# Altium PCB kardio (8).pcbdoc
Units mm, origin at the board's own origin, x right, y up, seen from the top; angles counter-clockwise.
Board outline 75 x 75 mm, 2 copper layers (Top Layer, Bottom Layer); 36 components, 33 nets, 151 pads, 20 vias.
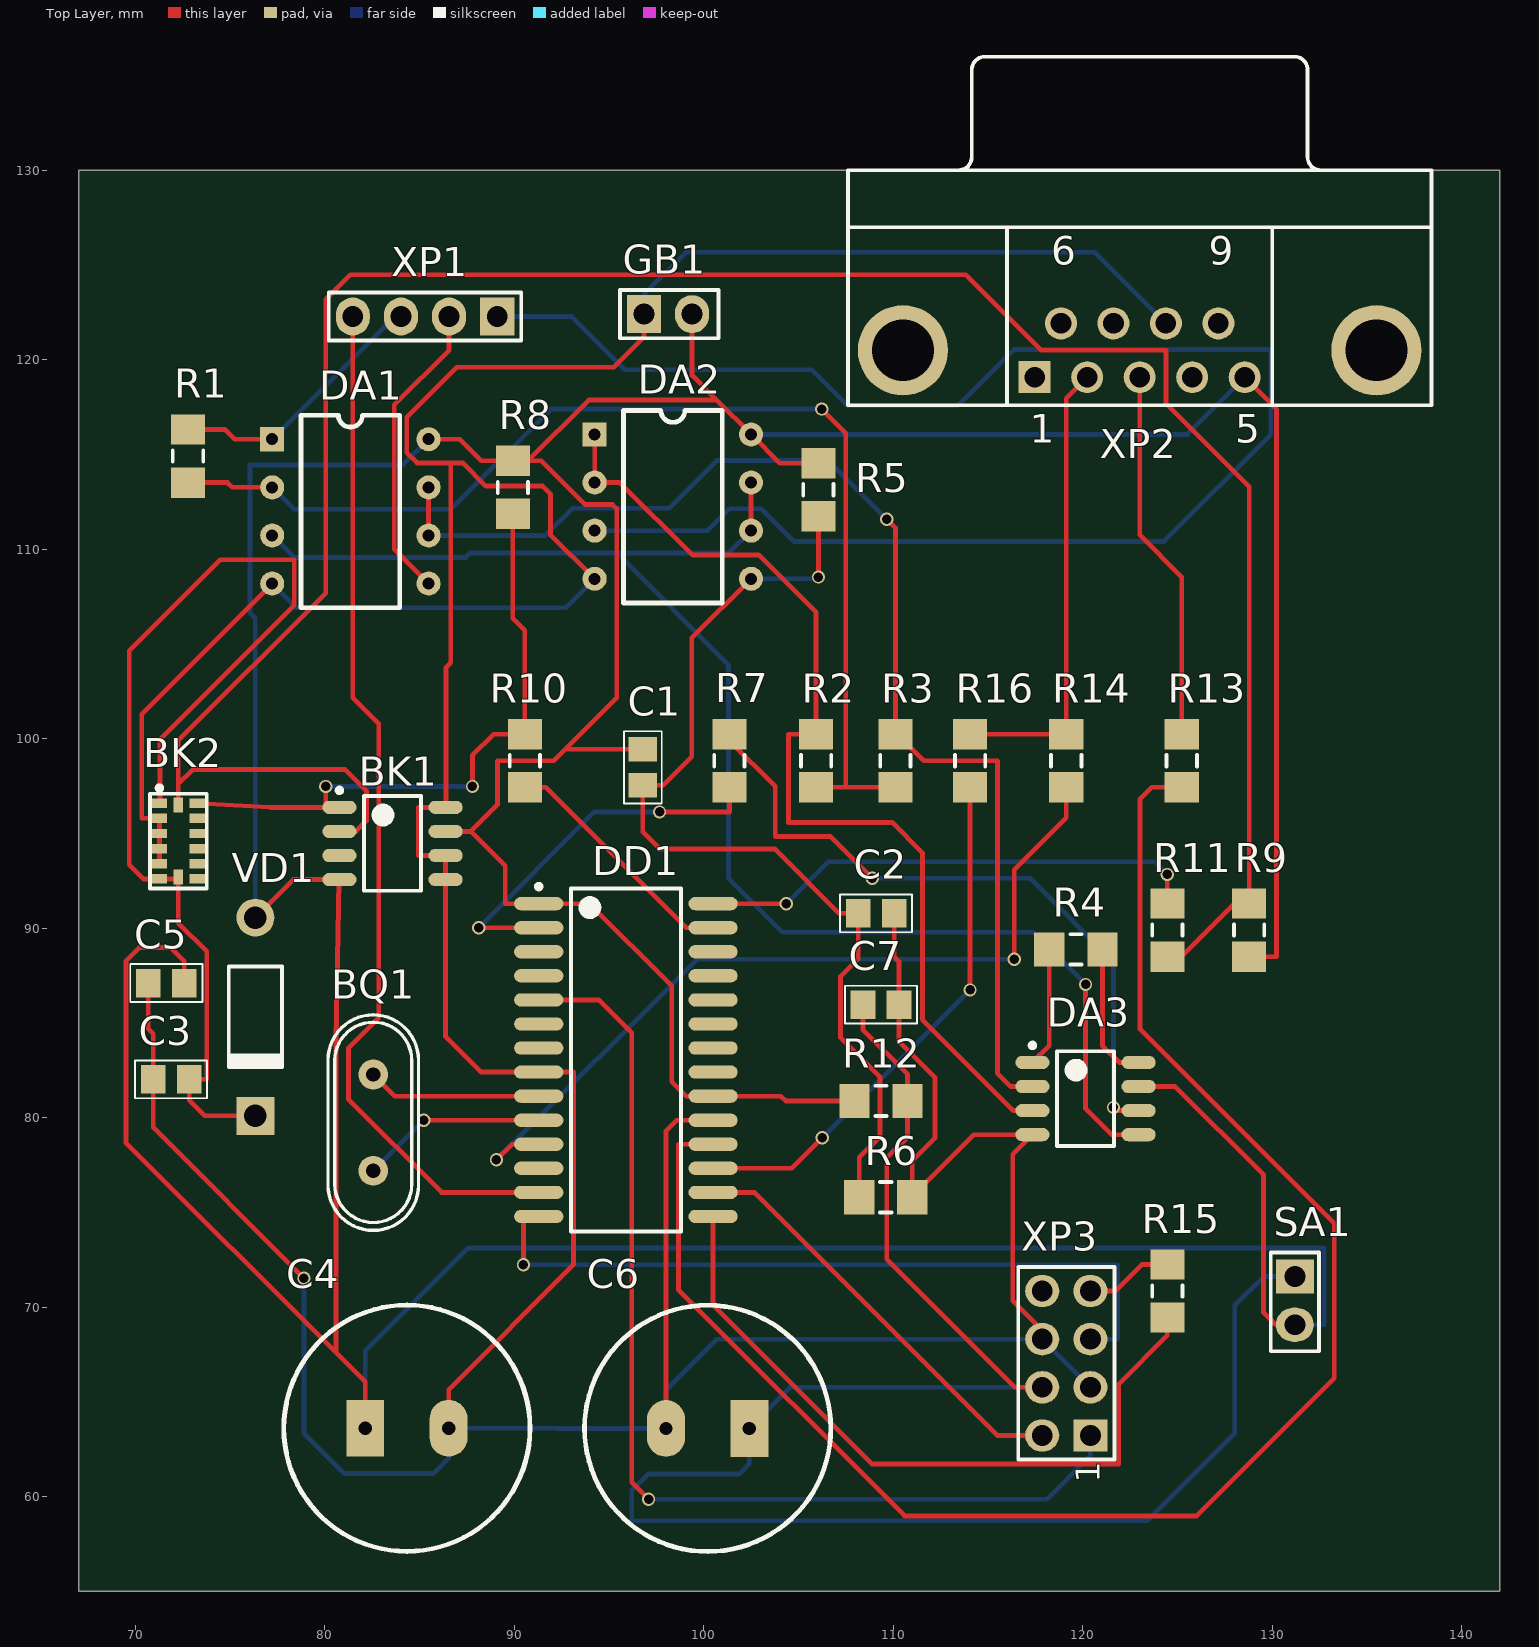
[diagram p0: Top Layer view]
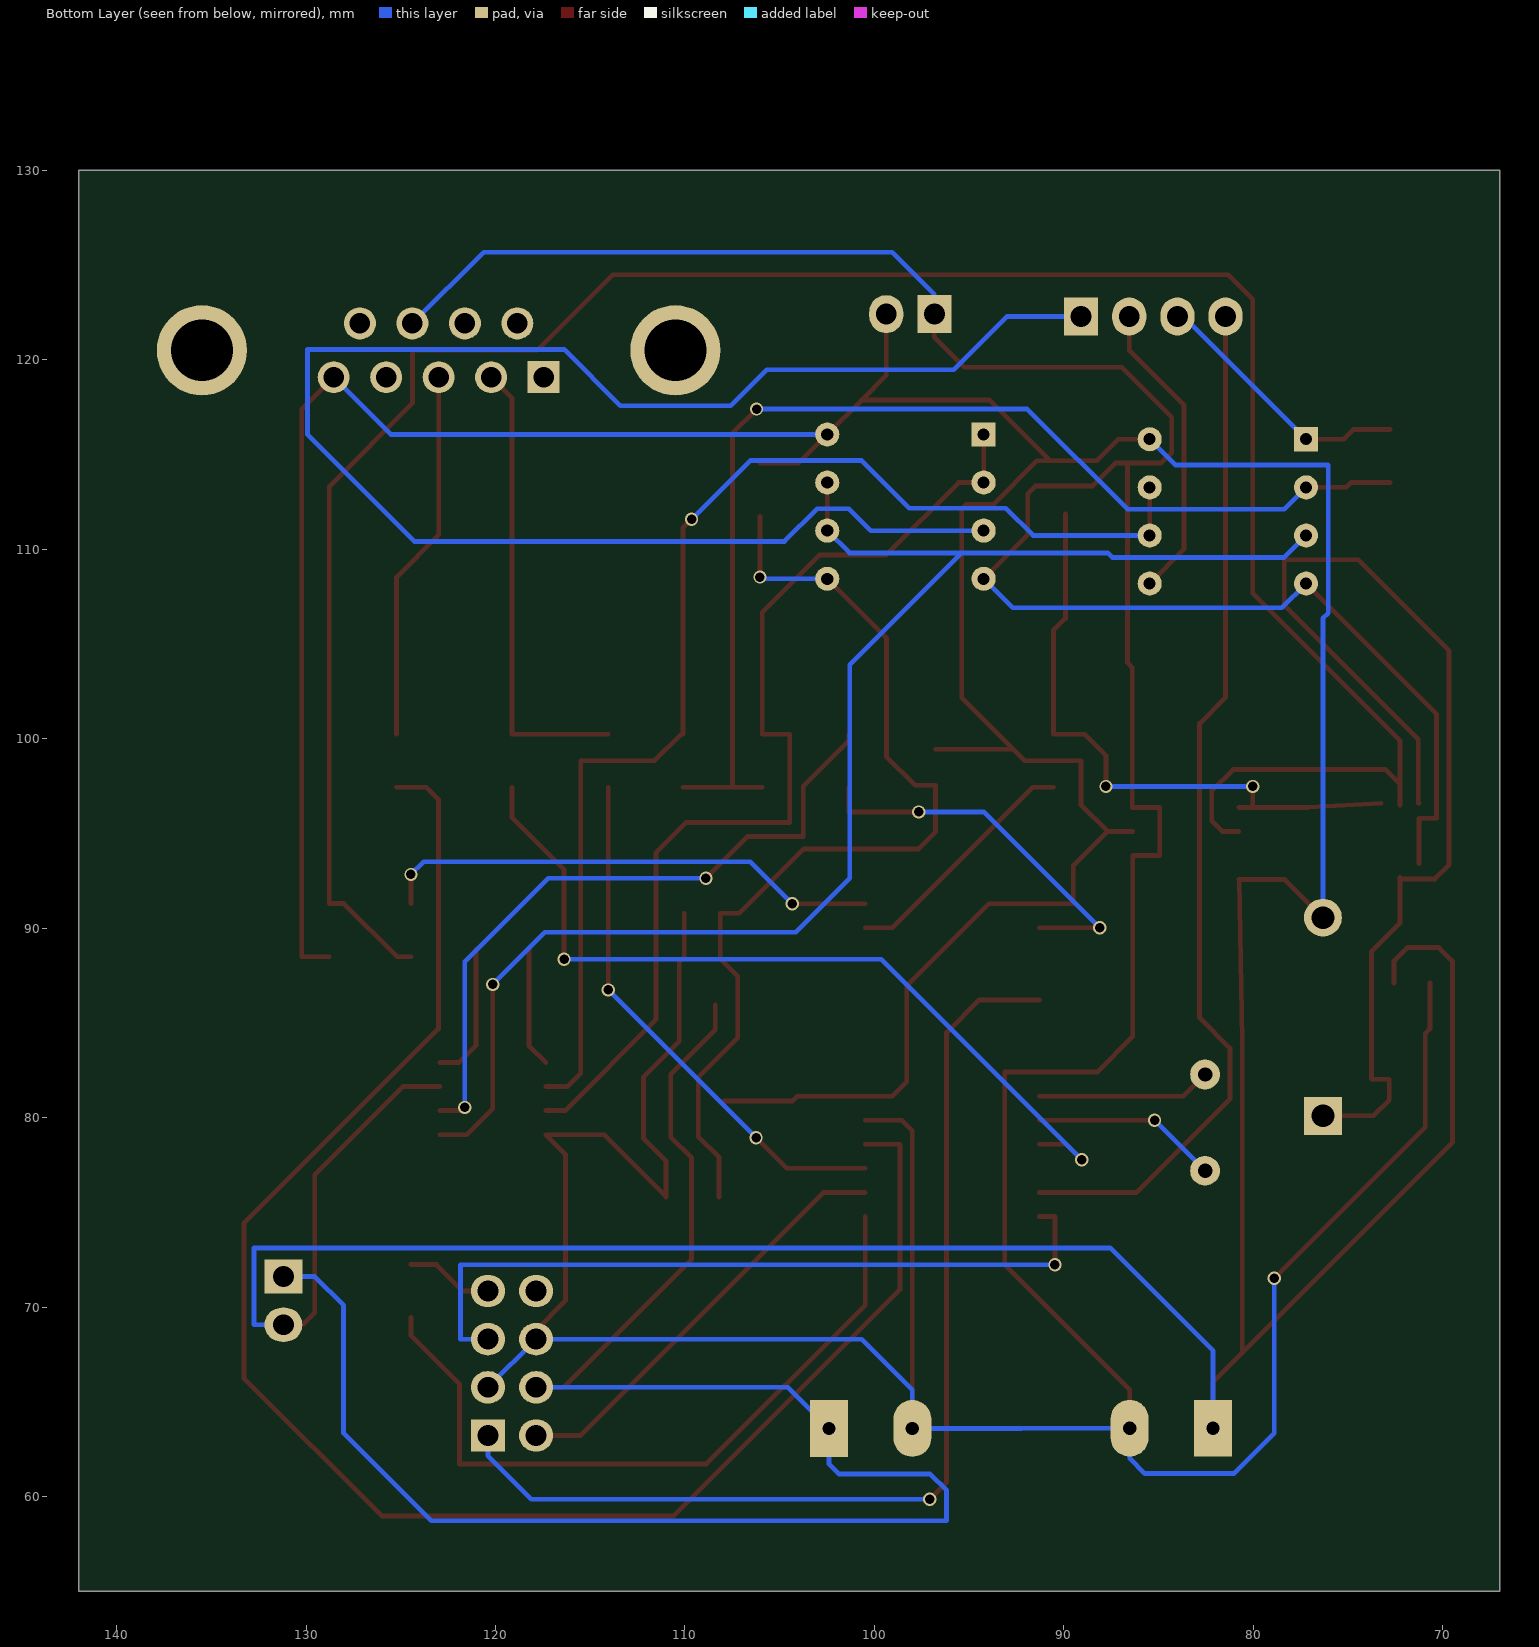
[diagram p1: Bottom Layer view, seen from below]

## Layer stack, top to bottom
Top Layer: signal copper 0.0356
Dielectric: dielectric 0.32, FR-4, Dk 4.8
Bottom Layer: signal copper 0.0356

## Board outline
67,55 142,55 142,130 67,130

## Design rules (kind name [scope] priority, off if disabled: settings)
Clearance [All] p1: gap=0.4
PolygonConnect [All] p1: connectstyle=Relief reliefconductorwidth=0.254 reliefentries=4 polygonreliefangle="90 Angle" airgapwidth=0.254
RoutingCorners [All] p1: cornerstyle=Round minsetback=0.2 maxsetback=2.54
RoutingVias [All] p1: holewidth=0.5 width=0.7 viastyle="Through Hole" minholewidth=0.5 minwidth=0.7 maxholewidth=0.711 maxwidth=1.27
SolderMaskExpansion [All] p1: expansion=0.102
Width [All] p1: maxlimit=0.25 minlimit=0.25 preferedwidth=0.25
27 further rules are at their usual default settings.

## Components (designator, comment, footprint, x,y, rotation, side; value= is the part's Value field where it differs from the comment)
BK1 "DS1621" SOIC-8CM 83.566,94.472 r0 top
BK2 "MMA7455LT" SOJ80P300X0-12M 72.263,94.599 r0 top
BQ1 "10МГц" HC49S 82.55,79.74 r90 top
C1 "0.22мк" C0805 96.774,98.489 r90 top
C2 "0.22мк" C0805 109.093,90.789 r180 top
C3 "0.1мк" C0805 71.882,82.026 r180 top
C4 "1000мк" "LZ 12x26 1000 мкФ x 25 В" 84.328,63.611 r0 top
C5 "0.1мк" C0805 71.628,87.106 r180 top
C6 "1000мк" "LZ 12x26 1000 мкФ x 25 В" 100.2,63.6 r180 top
C7 "0.1мк" C0805 109.347,85.963 r0 top
DA1 "КР1446УД1" PDIP8 77.216,115.808 r0 top
DA2 "КР1446УД1" PDIP8 94.234,116.062 r0 top
DA3 "AD623" SOIC-8CM 120.142,81.01 r0 top
DD1 "PIC16F873A" SOIC-SO28_M 95.885,83.042 r0 top
GB1 "3.6B" Button 100.521,123.428 r0 top
R1 "720К" 1206 72.771,114.919 r270 top
R2 "20К" 1206 105.918,98.841 r90 top
R3 "20К" 1206 110.109,98.841 r90 top
R4 "20К" 1206 119.634,88.884 r180 top
R5 "150К" 1206 106.045,113.141 r90 top
R6 "150К" 1206 109.601,75.803 r180 top
R7 "300" 1206 101.346,98.841 r270 top
R8 "4К7" 1206 89.916,113.268 r270 top
R9 "4К7" 1206 128.778,89.9 r90 top
R10 "300" 1206 90.551,98.841 r270 top
R11 "300" 1206 124.46,89.9 r90 top
R12 "10" 1206 109.347,80.883 r0 top
R13 "300" 1206 125.222,98.841 r90 top
R14 "300" 1206 119.126,98.841 r90 top
R15 "300" 1206 124.46,70.85 r90 top
R16 "300" 1206 114.046,98.841 r90 top
SA1 "Button" Button 132.207,67.929 r270 top
VD1 "КД522" DO-41 76.327,85.328 r270 top
XP1 "INPUT" "HDR1X4 - WA" 89.091,122.285 r180 top
XP2 "COM-port" COM-port 123,130 r0 top
XP3 "SD-card" "HDR2X4 - wide area" 120.396,63.23 r90 top

## Footprints (in the part's own frame and the unit in brackets; to place one, negate y for a bottom-side part, rotate by r counter-clockwise, add the part's x,y. Pads: shape width x height; smd on the part's side, far side on the other; paste and mask are expansions set on the pad)
1206 [mm] "Chip Resistor; Body 3.1 x 1.6 mm (LxW typ)"
  rect 1.6x1.8 smd: 1(-1.4,0) 2(1.4,0)
  silkscreen extent -0.3,-0.8 0.3,0.8
Button [mm]
  rect 1.8x2 hole 1.1: 1(-3.683,-1.016)
  oval 1.8x2 hole 1.1: 2(-1.143,-1.016)
  silkscreen extent -4.95,-2.29 0.25,0.25
C0805 [mm] "Chip Capacitor; Body 2.0 x 1.2 mm (LxW typ)"
  rect 1.3x1.5 smd: 1(-0.95,0) 2(0.95,0)
  silkscreen extent -1.9,-1 1.91,1
COM-port [mm] "Connector; D Subminiature AMPLIMITE 2000; 9 Position; Right Angle"
  rect 1.69x1.69 hole 1.09: 1(-5.54,-10.92)
  round 1.69 hole 1.09: 2(-2.77,-10.92) 3(0,-10.92) 4(2.77,-10.92) 5(5.54,-10.92) 6(-4.155,-8.08) 7(-1.385,-8.08) 8(1.385,-8.08) 9(4.155,-8.08)
  round 4.76 hole 3.26: 10(-12.495,-9.5) 11(12.495,-9.5)
  silkscreen extent -15.4,-12.4 15.4,6, body extent -15.4,-12.4 15.4,6, height 12.75
DO-41 [mm] "Diode, Axial; Body 5.2 x 2.7 mm (LxDia. max), Lead Dia. 0.86 mm (max)"
  round 2 hole 1.2: 1(-5.23,0)
  rect 2x2 hole 1.2: 2(5.23,0)
  silkscreen extent -2.65,-1.4 2.75,1.4
HC49S [mil]
  round 62 hole 30: 1(-100,0) 2(100,0)
  silkscreen extent -224,-94 224,94
"HDR1X4 - WA" [mm] "Разъем двухрядный, шаг 2,54 мм."
  rect 1.8x2 hole 1.1: 1(0,0)
  oval 1.8x2 hole 1.1: 2(2.54,0) 3(5.08,0) 4(7.62,0)
  silkscreen extent -1.27,-1.27 8.89,1.27
"HDR2X4 - wide area" [mm] "Connector; Header; 4x2 Position"
  rect 1.7x1.8 hole 1.1: 1(0,0)
  oval 1.7x1.8 hole 1.1: 2(0,2.54) 3(2.54,0) 4(2.54,2.54) 5(5.08,0) 6(5.08,2.54) 7(7.62,0) 8(7.62,2.54)
  silkscreen extent -1.27,-1.27 8.89,3.81
"LZ 12x26 1000 мкФ x 25 В" [mm] "D=12.0 d=0.7 S=4.4"
  rect 2x3 hole 0.7: 1(-2.2,0)
  oval 2x3 hole 0.7: 2(2.2,0)
  silkscreen extent -6.5,-6.5 6.5,6.5
PDIP8 [mm]
  rect 1.27x1.27 hole 0.635: 1(0,0)
  round 1.27 hole 0.635: 2(0,-2.54) 3(0,-5.08) 4(0,-7.62) 5(8.255,-7.62) 6(8.255,-5.08) 7(8.255,-2.54) 8(8.255,0)
  silkscreen extent 1.52,-8.89 6.73,1.27
SOIC-8CM [mm] "SOIC, 8-Leads, Body 4.9x3.9mm, Pitch 1.27mm, IPC Low Density"
  oval 1.8x0.7 smd: 1(-2.8,1.905) 2(-2.8,0.635) 3(-2.8,-0.635) 4(-2.8,-1.905) 5(2.8,-1.905) 6(2.8,-0.635) 7(2.8,0.635) 8(2.8,1.905)
  silkscreen extent -2.92,-2.5 1.5,2.93, body extent -2,-2.5 2,2.5, height 1.73
SOIC-SO28_M [mm] "SOIC, 28-Leads, Body 17.9x7.5mm, Pitch 1.27mm, IPC Low Density"
  oval 2.6x0.7 smd: 1(-4.6,8.255) 2(-4.6,6.985) 3(-4.6,5.715) 4(-4.6,4.445) 5(-4.6,3.175) 6(-4.6,1.905) 7(-4.6,0.635) 8(-4.6,-0.635) 9(-4.6,-1.905) 10(-4.6,-3.175) 11(-4.6,-4.445) 12(-4.6,-5.715) 13(-4.6,-6.985) 14(-4.6,-8.255) 15(4.6,-8.255) 16(4.6,-6.985) 17(4.6,-5.715) 18(4.6,-4.445) 19(4.6,-3.175) 20(4.6,-1.905) 21(4.6,-0.635) 22(4.6,0.635) 23(4.6,1.905) 24(4.6,3.175) 25(4.6,4.445) 26(4.6,5.715) 27(4.6,6.985) 28(4.6,8.255)
  silkscreen extent -4.72,-9.05 2.9,9.28, body extent -3.8,-9.06 3.8,9.06, height 2.65
SOJ80P300X0-12M [mm] "SOJ, 12-Leads, Body 5,00x3,00mm, Pitch 0,80mm, IPC Low Density"
  rect 0.8x0.5 smd: 1(-1,2) 2(-1,1.2) 3(-1,0.4) 4(-1,-0.4) 5(-1,-1.2) 6(-1,-2) 8(1,-2) 9(1,-1.2) 10(1,-0.4) 11(1,0.4) 12(1,1.2) 13(1,2)
  rect 0.5x0.8 smd: 7(0,-1.905) 14(0,1.905)
  silkscreen extent -1.5,-2.5 1.5,2.92, body extent -1.5,-2.5 1.5,2.5, height 0.01

## Part data
BK1: "Temperature sensor"
BK2: "Digital Output Accelerometer"
BQ1: library part "Cristal Oscilator"
C1 C2 C3 C5 C7: library part Capasitior
C4 C6: library part "Capasitor electrolit"
DA3: "Amplifier"
DD1: library part PIC16F873A-I/SO, "Enhanced FLASH Microcontroller, 4K (x14-Bit words) FLASH, 192 Bytes RAM, 28-Pin SOIC, Standard VDD Range, Industrial Temperature"
GB1: library part Batery
R1 R2 R3 R4 R5 R6 R7 R8 R9 R10 R11 R12 R13 R14 R15 R16: library part Resistor

## Via types
v1: diameter 0.7, hole 0.5, Top Layer to Bottom Layer, 20 vias

## Nets (pads, with @x,y where several pads share a name; then routed paths per layer and width w, separated by ;. In a path a pad name is that pad's centre, name@x,y a point inside that pad or via, vN(x,y) a via of type N, cw(c..) or ccw(c..) an arc to the next point about the centre after c; other vN are vias at no path point)
3.6В: BK1.4 BK1.7 C1.2 C4.1 C5.1 DA1.8 DA2.8 DA3.7 DD1.1 DD1.20 GB1.2 R5.2 R8.1 R9.1 R12.1 SA1.2 VD1.1 XP2.5 | length 331.5
  Top Layer w0.25: C5.1 72.578,88.265 71.867,88.976 70.206,88.976 69.494,88.265 69.494,78.689 80.588,67.596 ; VD1.1 78.336,92.567 BK1.4@80.747,92.567 ; BK1.4 BK1.4@80.747,92.567 ; C4.1 82.128,66.056 80.588,67.596 ; DA1.8 87.122,115.808 88.262,114.668 R8.1 R8.1@90.716,114.668 ; BK1.7 87.69,95.107 ; C1.2 92.683,99.439 ; GB1.2 99.378,119.173 100.679,117.872 ; R5.2 104.01,114.541 DA2.8 100.679,117.872 ; R12.1 104.318,80.883 104.064,81.137 DD1.20 99.06,81.137 98.298,81.899 98.298,86.954 93.955,91.297 DD1.1 89.51,91.297 89.51,93.288 87.69,95.107 ; DA3.7 124.882,81.645 129.54,76.987 129.54,69.707 130.175,69.072 SA1.2 ; XP2.5 130.226,117.394 130.226,88.5 R9.1 ; 80.588,67.596 80.588,84.083 BK1.4@80.747,92.567 ; 87.69,95.107 89.103,96.52 89.103,98.831 92.075,98.831 92.683,99.439 ; R8.1@90.716,114.668 91.428,114.668 93.734,112.362 95.173,112.362 95.394,112.141 95.394,102.15 92.683,99.439 ; R8.1@90.716,114.668 93.92,117.872 100.679,117.872
  Bottom Layer w0.25: VD1.1 76.327,106.35 76.048,106.629 76.048,114.452 84.115,114.452 DA1.8 ; C4.1 82.128,67.701 87.554,73.127 132.74,73.127 132.74,69.072 SA1.2 ; DA2.8 125.522,116.062 XP2.5
CS: DD1.5 XP3.1 | length 56
  Top Layer w0.25: DD1.5 94.463,86.217 96.19,84.49 96.19,60.757 v1(97.079,59.868)
  Bottom Layer w0.25: v1(97.079,59.868) 118.11,59.868 120.396,62.154 XP3.1
GND: BK1.5 BK1.6 BK1.8 BK2.2 BK2.3 BK2.4 BK2.5 C2.1 C3.2 C4.2 C5.2 C6.2 C7.2 DA1.4 DA2.4 DA3.4 DD1.8 DD1.19 GB1.1 R6.1 XP2.8 XP3.3 XP3.6 | length 291.5
  Top Layer w0.25: C5.2 70.678,84.684 70.932,84.43 C3.2 70.932,79.487 v1(78.892,71.526) ; BK2.5 BK2.4 BK2.3 BK2.2 70.342,95.799 70.333,95.809 70.333,101.305 DA1.4 ; C4.2 86.528,65.653 93.116,72.241 93.116,82.407 DD1.8 88.24,82.407 86.36,84.287 86.36,92.567 BK1.5 BK1.6 84.938,93.837 84.938,96.377 BK1.8 86.385,96.377 86.385,103.759 86.639,104.013 86.639,114.554 ; DA2.4 91.903,110.773 91.903,112.931 91.499,113.335 88.494,113.335 87.274,114.554 86.639,114.554 ; GB1.1 96.838,121.197 95.25,119.609 86.952,119.609 84.311,116.968 84.311,115.104 84.861,114.554 86.639,114.554 ; C6.2 98,79.31 98.557,79.867 DD1.19 ; C2.1 110.043,88.494 110.297,88.24 C7.2 110.297,84.022 112.192,82.127 112.192,78.918 111.001,77.727 R6.1@111.001,75.857 ; R6.1 R6.1@111.001,75.857 ; XP3.6 117.856,68.783 116.307,70.333 116.307,78.07 DA3.4 114.249,79.105 R6.1@111.001,75.857
  Bottom Layer w0.25: DA1.4 78.495,106.909 92.701,106.909 DA2.4 ; v1(78.892,71.526) 78.892,63.348 81.026,61.214 85.725,61.214 86.528,62.017 C4.2 92.253,63.611 92.264,63.6 C6.2 98,65.634 100.676,68.31 XP3.6 XP3.3 ; GB1.1 96.838,123.457 99.06,125.679 120.626,125.679 XP2.8
IN: DD1.13 XP1.4 | length 54.6
  Top Layer w0.25: XP1.4 81.471,102.171 82.841,100.801 82.841,85.279 81.238,83.676 81.238,80.975 86.156,76.057 DD1.13
NetBK1_1: BK1.1 BK2.13 R8.2 R10.1 | length 33.1
  Top Layer w0.25: BK2.13 77.108,96.377 BK1.1@80.035,96.377 ; v1(80.035,97.485) BK1.1@80.035,96.377 ; BK1.1 BK1.1@80.035,96.377 ; v1(87.782,97.485) 87.782,99.123 88.9,100.241 R10.1 90.551,105.715 89.916,106.35 R8.2
  Bottom Layer w0.25: v1(80.035,97.485) v1(87.782,97.485)
NetBK1_2: BK1.2 BK2.14 R9.2 R11.1 | length 126.9
  Top Layer w0.25: BK2.14 72.263,97.612 ; BK1.2 81.636,95.107 82.191,95.662 82.191,97.257 81.073,98.374 73.025,98.374 72.263,97.612 ; R11.1 125.197,88.5 127.997,91.3 R9.2 128.778,113.309 124.384,117.704 124.384,120.498 117.805,120.498 113.817,124.485 81.331,124.485 80.035,123.19 80.035,107.689 72.263,99.917 72.263,97.612
NetBK2_1: BK2.1 BK2.6 BK2.7 C3.1 VD1.2 | length 57.9
  Top Layer w0.25: BK2.1 71.298,96.599 71.298,99.974 78.376,107.053 78.376,109.449 74.473,109.449 69.672,104.648 69.672,93.345 70.418,92.599 BK2.6 BK2.7@72.263,92.599 ; BK2.7 BK2.7@72.263,92.599 ; VD1.2 73.66,80.098 72.832,80.926 C3.1 73.762,82.026 73.762,88.773 72.263,90.272 BK2.7@72.263,92.599
NetBQ1_1: BQ1.1 DD1.10 | length 9.8
  Top Layer w0.25: v1(85.217,79.867) DD1.10
  Bottom Layer w0.25: BQ1.1 v1(85.217,79.867)
NetBQ1_2: BQ1.2 DD1.9 | length 9.2
  Top Layer w0.25: BQ1.2 83.693,81.137 DD1.9
NetC1_1: C1.1 C2.2 DA2.5 R5.1 R6.2 | length 53
  Top Layer w0.25: DA2.5 99.365,105.318 99.365,99.06 97.844,97.539 C1.1 96.774,95.081 97.672,94.183 103.731,94.183 107.125,90.789 C2.2 108.143,88.382 107.213,87.452 107.213,84.226 109.296,82.144 109.296,78.994 108.201,77.899 R6.2 ; v1(106.045,108.534) R5.1
  Bottom Layer w0.25: DA2.5 105.953,108.442 v1(106.045,108.534)
NetDA1_1: DA1.1 R1.1 XP1.3 | length 14.2
  Top Layer w0.25: R1.1 74.727,116.319 75.238,115.808 DA1.1
  Bottom Layer w0.25: DA1.1 83.522,122.114 84.011,122.114 XP1.3
NetDA1_2: DA1.2 R1.2 R2.1 R3.1 | length 60.9
  Top Layer w0.25: R1.2 74.854,113.519 75.105,113.268 DA1.2 ; R2.1 107.493,97.441 ; v1(106.223,117.399) 107.493,116.129 107.493,97.441 ; R3.1 107.493,97.441
  Bottom Layer w0.25: DA1.2 78.376,112.108 86.639,112.108 91.93,117.399 v1(106.223,117.399)
NetDA1_3: DA1.3 DA2.6 DA2.7 DA3.5 | length 79.6
  Top Layer w0.25: DA2.6 DA2.7 ; v1(120.142,87.034) 120.142,80.477 121.514,79.105 DA3.5
  Bottom Layer w0.25: DA1.3 78.376,109.568 87.438,109.568 87.675,109.804 95.402,109.804 ; DA2.6 101.311,109.804 95.402,109.804 ; v1(120.142,87.034) 117.387,89.789 104.14,89.789 101.295,92.634 101.295,103.911 95.402,109.804
NetDA1_5: DA1.5 XP1.2 | length 16
  Top Layer w0.25: DA1.5 83.661,109.998 83.661,117.618 86.551,120.508 XP1.2
NetDA1_6: DA1.6 DA1.7 DA3.2 R3.2 | length 65.8
  Top Layer w0.25: DA1.6 DA1.7 ; v1(109.652,111.582) 110.109,111.125 R3.2 110.198,100.241 111.608,98.831 115.494,98.831 115.494,82.356 116.205,81.645 DA3.2
  Bottom Layer w0.25: DA1.6 91.627,110.728 93.066,112.166 98.163,112.166 100.679,114.682 106.552,114.682 v1(109.652,111.582)
NetDA2_1: DA2.1 DA2.2 DA3.3 R2.2 | length 53.9
  Top Layer w0.25: DA2.1 DA2.2 95.562,113.522 99.381,109.703 102.895,109.703 105.918,106.68 R2.2 104.47,100.241 104.47,95.58 109.931,95.58 111.531,93.98 111.531,85.166 116.323,80.375 DA3.3
NetDA2_3: DA2.3 XP1.1 | length 87.7
  Bottom Layer w0.25: XP1.1 93.015,122.285 95.818,119.482 105.689,119.482 107.594,117.577 113.411,117.577 116.383,120.548 129.921,120.548 129.921,116.053 124.282,110.414 104.75,110.414 103.021,112.142 101.346,112.142 100.186,110.982 DA2.3
NetDA3_1: DA3.1 R4.2 | length 6.3
  Top Layer w0.25: DA3.1 118.234,83.807 R4.2
NetDA3_6: DA3.6 R7.1 | length 36.1
  Top Layer w0.25: R7.1 101.346,99.898 103.759,97.485 103.759,94.844 106.68,94.844 v1(108.89,92.634) ; v1(121.615,80.543) 121.784,80.375 DA3.6
  Bottom Layer w0.25: v1(108.89,92.634) 117.221,92.634 121.615,88.24 v1(121.615,80.543)
NetDA3_8: DA3.8 R4.1 | length 7.4
  Top Layer w0.25: R4.1 121.034,83.801 121.92,82.915 DA3.8
NetDD1_2: DD1.2 R7.2 | length 20.2
  Top Layer w0.25: v1(88.113,90.027) DD1.2 ; v1(97.663,96.139) 101.346,96.139 R7.2
  Bottom Layer w0.25: v1(88.113,90.027) 94.225,96.139 v1(97.663,96.139)
NetDD1_11: DD1.11 R14.1 | length 44.5
  Top Layer w0.25: v1(89.052,77.775) 89.875,78.597 DD1.11 ; v1(116.383,88.367) 116.383,93.091 119.126,95.834 R14.1
  Bottom Layer w0.25: v1(89.052,77.775) 99.644,88.367 v1(116.383,88.367)
NetDD1_15: DD1.15 R15.1 | length 38.4
  Top Layer w0.25: DD1.15 100.482,74.787 100.482,70.106 108.866,61.722 121.895,61.722 121.895,65.938 124.46,68.504 R15.1
NetDD1_17: DD1.17 R16.1 | length 28.2
  Top Layer w0.25: DD1.17 104.632,77.327 v1(106.248,78.943) ; v1(114.046,86.741) R16.1
  Bottom Layer w0.25: v1(106.248,78.943) v1(114.046,86.741)
NetDD1_18: DD1.18 R13.1 | length 89.4
  Top Layer w0.25: DD1.18 98.654,78.597 98.654,70.917 110.592,58.979 126.009,58.979 133.274,66.243 133.274,74.422 123.012,84.684 123.012,96.806 123.647,97.441 R13.1
NetDD1_27: DD1.27 R10.2 | length 13
  Top Layer w0.25: R10.2 91.646,97.441 99.06,90.027 DD1.27
NetDD1_28: DD1.28 R11.2 | length 26.7
  Top Layer w0.25: DD1.28 v1(104.343,91.297) ; R11.2 v1(124.46,92.837)
  Bottom Layer w0.25: v1(104.343,91.297) 106.555,93.509 123.788,93.509 v1(124.46,92.837)
RX: R13.2 XP2.3 | length 19.8
  Top Layer w0.25: XP2.3 123,110.756 125.222,108.534 R13.2
SCK: DD1.14 XP3.5 | length 40.1
  Top Layer w0.25: v1(90.475,72.238) 90.475,74.787 DD1.14
  Bottom Layer w0.25: v1(90.475,72.238) 121.844,72.238 121.844,68.31 XP3.5
SDI: R15.2 XP3.7 | length 4.6
  Top Layer w0.25: XP3.7 121.717,70.85 123.117,72.25 R15.2
SDO: DD1.16 XP3.2 | length 22.7
  Top Layer w0.25: DD1.16 102.667,76.057 115.494,63.23 XP3.2
TX: R14.2 R16.2 XP2.2 | length 24.4
  Top Layer w0.25: R16.2 R14.2 119.126,117.976 XP2.2
VDD: C6.1 C7.1 R12.2 SA1.1 XP3.4 | length 96.8
  Top Layer w0.25: C7.1 108.397,84.643 110.747,82.293 R12.2 110.747,78.969 109.652,77.873 109.652,72.526 116.408,65.77 XP3.4
  Bottom Layer w0.25: XP3.4 104.57,65.77 C6.1 102.4,61.722 101.867,61.189 97.053,61.189 96.19,60.325 96.19,58.725 123.393,58.725 128.016,63.348 128.016,70.088 129.54,71.612 SA1.1
pads on no net: BK1.3 BK2.8 BK2.9 BK2.10 BK2.11 BK2.12 DD1.3 DD1.4 DD1.6 DD1.7 DD1.12 DD1.21 DD1.22 DD1.23 DD1.24 DD1.25 DD1.26 XP2.1 XP2.4 XP2.6 XP2.7 XP2.9 XP2.10 XP2.11 XP3.8

## Silkscreen, mask and mechanical layers (free items; w line width, h text height)
Mechanical 15:
  the board outline again, w0.254

## Text inside footprints (layer, text, board x,y; h text height)
XP2: Top Overlay "1" at 117.21,115.625 h1.5; Top Overlay "5" at 128.04,115.625 h1.5; Top Overlay "9" at 126.655,125.025 h1.5; Top Overlay "6" at 118.345,125.025 h1.5
XP3: Top Overlay "1" at 120.896,60.73 h1.27 r90